# Altium PCB nexus5.PcbDoc (part 2 of 2)
Units mm, origin at the board's own origin, x right, y up, seen from the top; angles counter-clockwise.
Board outline 100 x 100 mm, 2 copper layers (Top Layer, Bottom Layer); 163 components, 162 nets, 798 pads, 136 vias.
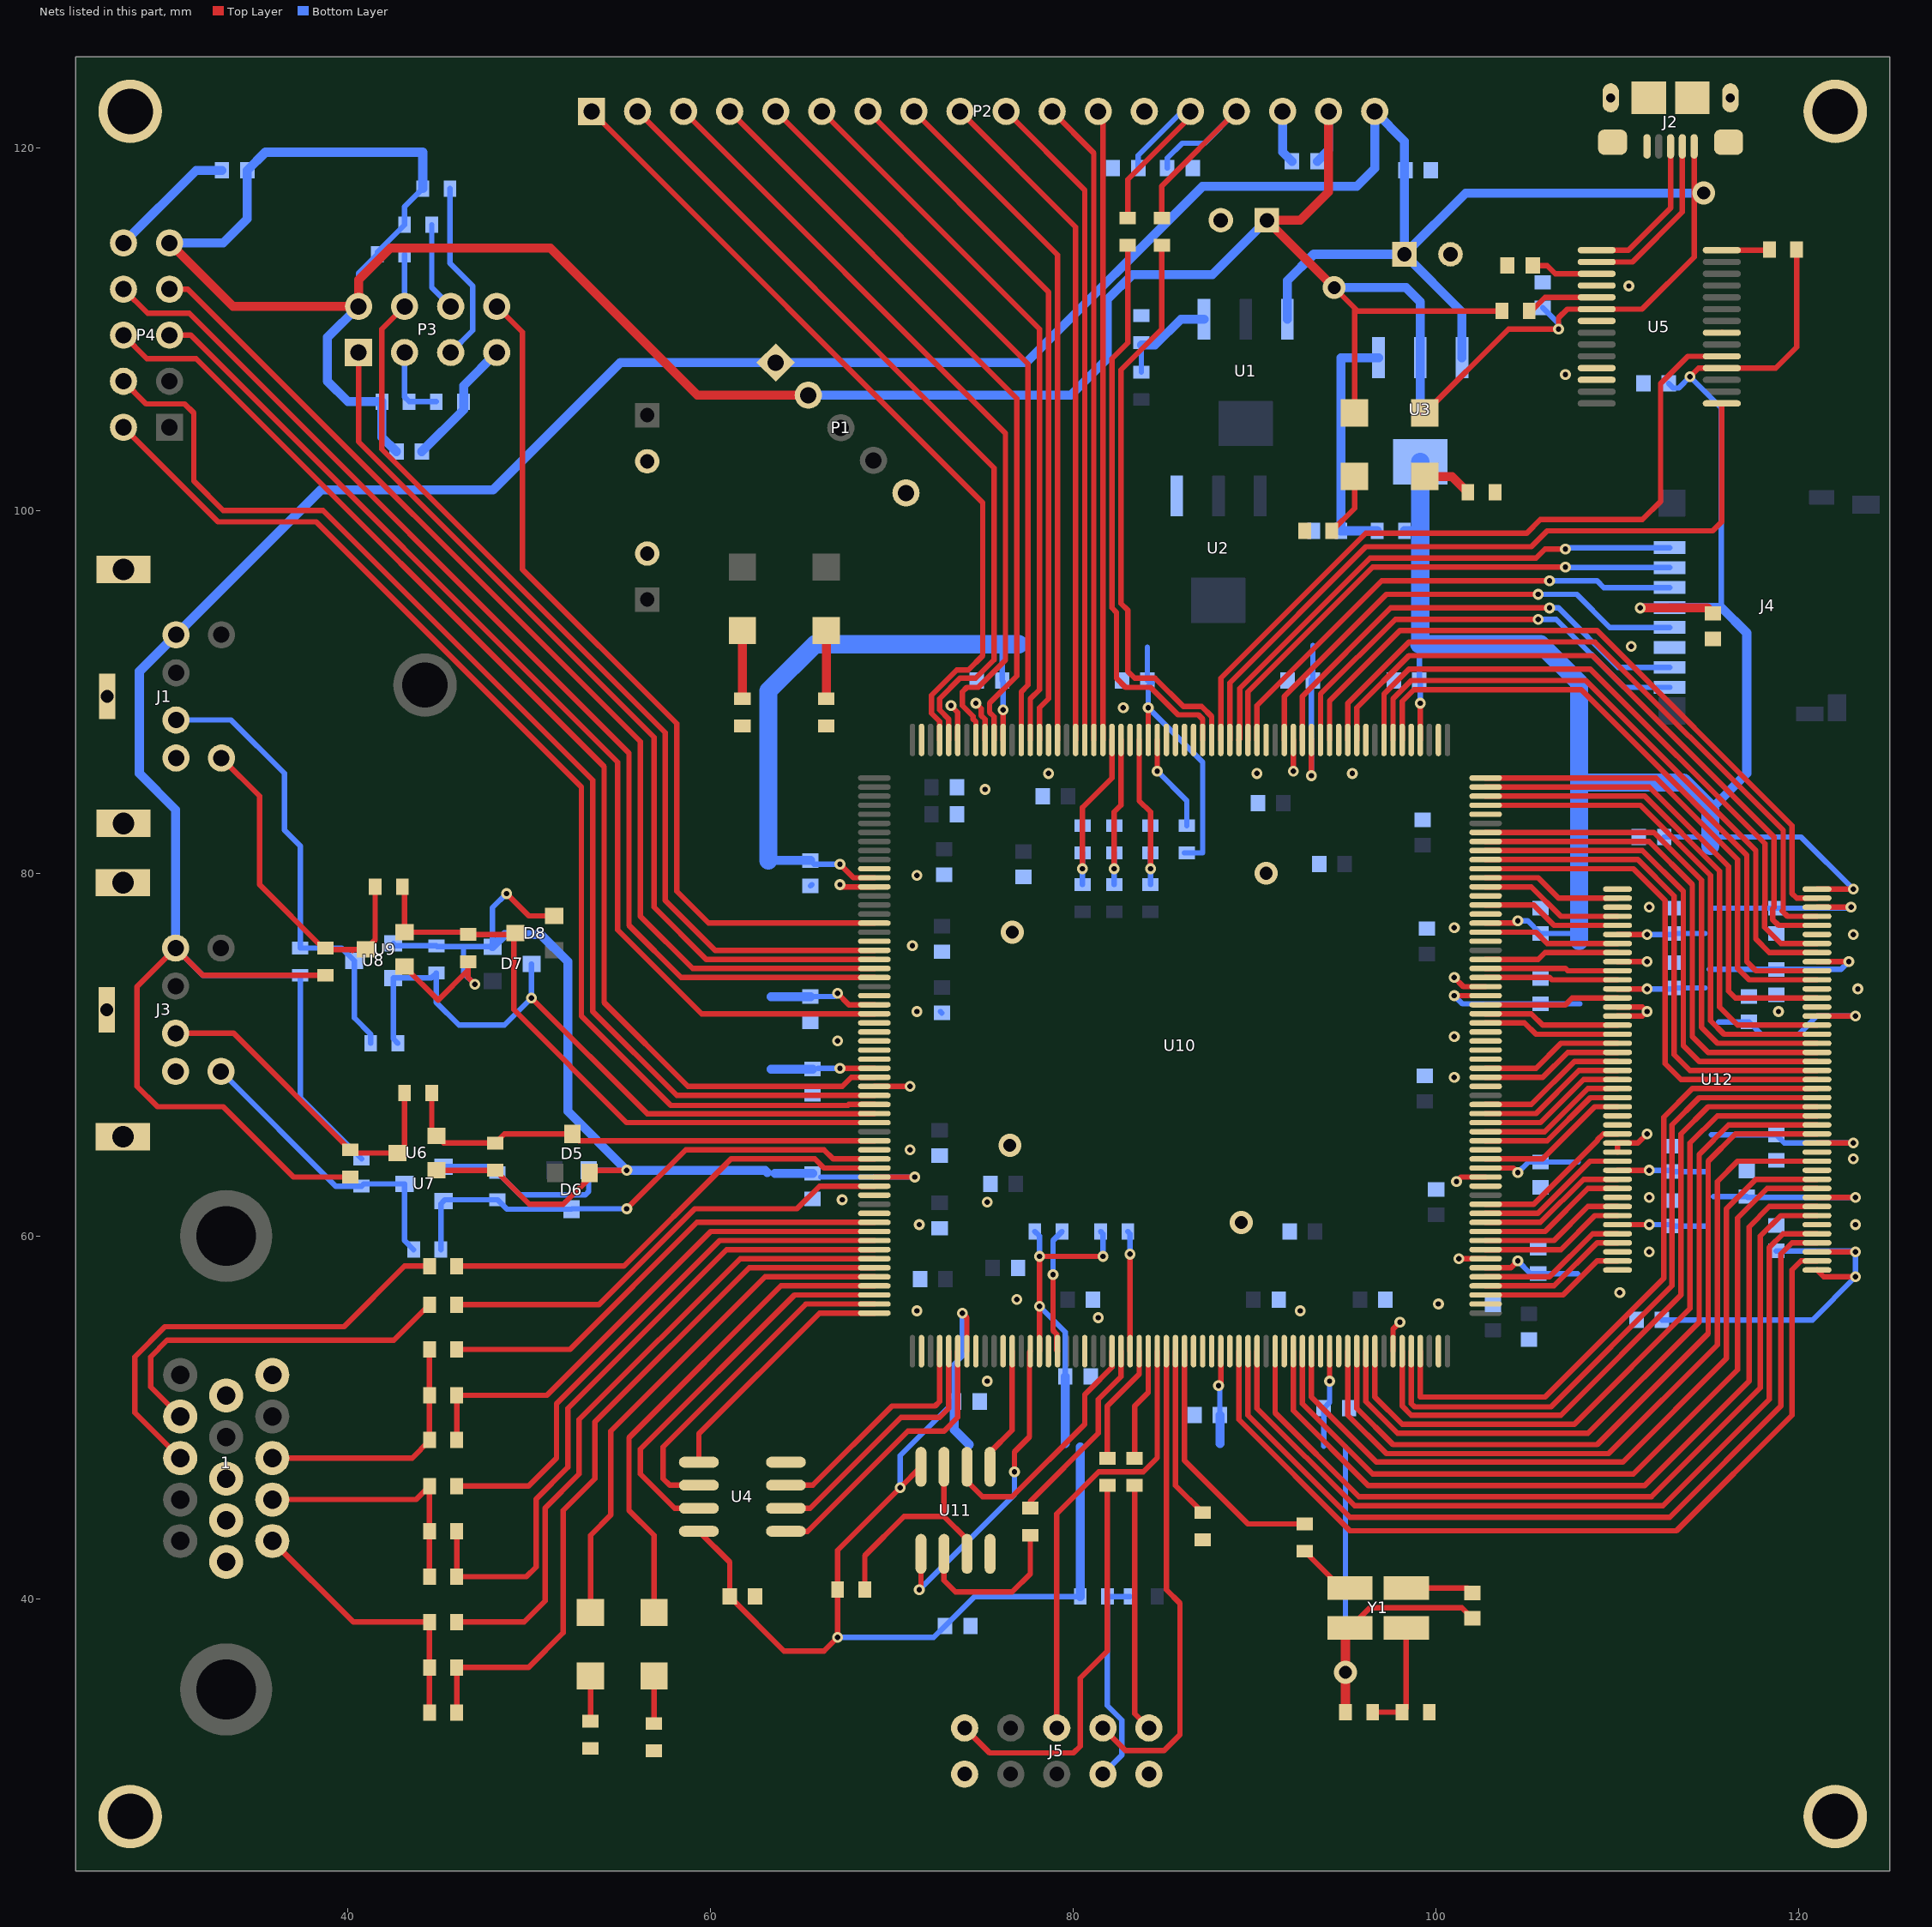
[diagram p2: the nets of this part, all layers, seen from the top]

## Via types
v1: diameter 0.6, hole 0.3, Top Layer to Bottom Layer, tented both sides, 125 vias
v2: diameter 1.27, hole 0.711, Top Layer to Bottom Layer, tented both sides, 11 vias

## Nets (pads, with @x,y where several pads share a name; then routed paths per layer and width w, separated by ;. In a path a pad name is that pad's centre, name@x,y a point inside that pad or via, vN(x,y) a via of type N, cw(c..) or ccw(c..) an arc to the next point about the centre after c; other vN are vias at no path point) (continued)
3V: C2.1 C6.2 C8.1 C9.2 C13.2 C14.2 C15.2 C16.2 C17.2 C18.2 C19.2 C20.2 C21.2 C22.2 C23.2 C24.2 C25.2 C43.2 C44.2 C45.2 C46.2 C47.2 C48.2 C49.2 C50.2 C51.2 C52.2 C53.2 C54.2 C55.2 C56.2 C61.2 C62.2 C63.2 C64.2 C65.2 C66.2 D2.1 D5.2 D6.2 D7.2 D8.2 J4.4 P1.2 P2.17 P3.2 P4.9 R5.2 R13.2 R14.1 R15.2 R17.2 R19.2 R22.2 R25.2 R26.2 R27.2 R28.2 R31.2 R41.2 R56.1 R57.1 R58.1 R60.1 U3.2 U4.8 U5.4 U6.1 U7.1 U8.1 U9.1 U10.7 U10.15 U10.35 U10.47 U10.66 U10.77 U10.96 U10.104 U10.124 U10.136 U10.154 U10.170 U10.192 U10.206 U10.213 U10.225 U11.8 U12.1 U12.3 U12.9 U12.15 U12.29 U12.35 U12.41 U12.43 U12.49 U12.55 U12.75 U12.81 Y1.4 | length 651.8
  Top Layer w0.3: U9.1@43.125,74.85 44.975,73 46.625,74.65 ; U6.1@44.875,63.625 R15.2@48.125,63.625 50,61.75 51.875,61.75 53.75,63.625 v1(55.375,63.625) ; R22.2@46.625,75.125 46.625,74.65 ; v1(47,73.875) 46.625,74.25 46.625,74.65 ; v1(48.75,78.875) 49.975,77.65 D8.2@51.375,77.65 ; U4.8@59.35,43.72 61.05,42.02 C6.2@61.05,40.125 64.05,37.125 66.25,37.125 v1(67,37.875) R31.2@67,40.5 67,42.68 v1(70.445,46.125) U11.8@71.595,47.275 ; v1(67,73.375) 67.625,72.75 U10.206@69.025,72.75 ; v1(67.125,69.25) U10.213@69.025,69.25 ; v1(67.125,80.5) 67.875,79.75 U10.192@69.025,79.75 ; U10.225@69.025,63.25 v1(71.25,63.25) ; v1(73.875,55.75) 74.125,55.5 U10.7@74.125,53.65 ; U10.170@76.125,87.35 v1(76.125,89) ; U10.15@78.125,53.65 v1(78.125,58.875) v1(81.625,58.875) ; U10.154@84.125,87.35 v1(84.125,89.125) ; v1(88,51.75) 88.125,51.875 U10.35@88.125,53.65 ; v1(93.125,85.375) U10.136@93.125,87.35 ; v1(94.125,52) U10.47@94.125,53.65 ; v2(94.375,112.29) 95.5,111.165 ; Y1.4@95.25,38.4 96.35,39.5 101.425,39.5 C17.2@102,38.925 ; D2.1@95.5,105.375 95.5,111.165 ; U10.124@99.125,87.35 v1(99.125,89.375) ; v1(101,73.25) U10.96@102.725,73.25 ; U10.66@102.725,58.25 104.125,58.25 v1(104.5,58.625) ; U10.77@102.725,63.75 104.25,63.75 v1(104.5,63.5) ; U10.104@102.725,77.25 104.375,77.25 v1(104.5,77.375) ; R14.1@103.625,111 95.665,111 95.5,111.165 ; U12.81@110,60.625 v1(111.75,60.625) ; U12.75@110,63.625 v1(111.75,63.625) ; U12.55@110,73.625 v1(111.625,73.625) ; U12.49@110,76.625 v1(111.625,76.625) ; v1(114,107.375) 114.475,107.85 U5.4@115.75,107.85 118.725,107.85 119.875,109 R13.2@119.875,114.375 ; U12.1@121,58.125 121.375,57.75 v1(123.125,57.75) ; U12.3@121,59.125 v1(123.125,59.125) ; U12.9@121,62.125 v1(123.125,62.125) ; U12.15@121,65.125 v1(123,65.125) ; U12.29@121,72.125 v1(123.125,72.125) ; U12.35@121,75.125 v1(122.75,75.125) ; U12.41@121,78.125 v1(122.875,78.125) ; U12.43@121,79.125 v1(123,79.125)
  Top Layer w0.5: P4.9@30.165,114.745 33.66,111.25 P3.2@40.585,111.25 40.585,112.71 42.335,114.46 51.165,114.46 59.272,106.353 P1.2@65.381,106.353 ; P2.17@94.07,122 94.07,117.57 92.5,116 C2.1@90.665,116 v2(94.375,112.29) ; R60.1@95,33.75 v2(95,35.95) 95,38.15 Y1.4@95.25,38.4 ; v1(111.25,94.625) 114.95,94.625 C15.2@115.25,94.325
  Bottom Layer w0.3: P3.2@40.585,111.25 40.585,113.085 R26.2@41.625,114.125 41.625,114.25 R25.2@43.125,115.75 43.125,116.75 R27.2@44.125,117.75 ; U8.1@42.5,76.125 42.625,76 R19.2@44.875,76 44.925,75.95 46.375,75.95 ; U7.1@45.275,63.825 47.925,63.825 R17.2@48.25,63.5 49.473,62.277 53.089,62.277 53.275,62.463 D6.2@53.275,63.625 v1(55.375,63.625) ; v1(47,73.875) 46.375,74.5 46.375,75.95 ; v1(48.75,78.875) 47.975,78.1 D7.2@47.975,75.95 46.375,75.95 ; C20.2@65.5,73.2 66.825,73.2 v1(67,73.375) ; C18.2@65.5,80.7 65.7,80.5 v1(67.125,80.5) ; C21.2@65.925,69.25 v1(67.125,69.25) ; C22.2@66.075,63.25 v1(71.25,63.25) ; v1(67,37.875) 72.3,37.875 C14.2@72.925,38.5 74.55,40.125 R41.2@80.375,40.125 ; v1(70.445,46.125) 70.445,47.895 C23.2@73.425,50.875 73.425,52.925 73.875,53.375 v1(73.875,55.75) ; 76.075,92.45 C50.2@76.075,90.625 76.125,90.575 v1(76.125,89) ; R57.1@77.875,60.25 78.125,60 v1(78.125,58.875) ; v1(78.125,56.125) 79.55,54.7 C24.2@79.55,52.25 ; R56.1@81.5,60.25 81.625,60.125 v1(81.625,58.875) ; C48.2@84.075,90.625 84.075,92.45 ; C48.2@84.325,90.5 84.125,90.3 v1(84.125,89.125) 87.125,86.125 87.125,81.125 R58.1@86.25,81.125 R58.1@86.125,81.125 ; v1(88,51.75) 88.075,51.675 C25.2@88.075,50.125 ; v1(93.125,85.375) C49.2@93.125,90.673 ; C49.2@93.2,90.625 93.2,92.55 ; 93.8,48.425 C43.2@93.8,50.5 94.125,50.825 v1(94.125,52) ; v2(95,35.95) 95,48.375 ; 99.075,92.625 C47.2@99.075,90.625 99.125,90.575 v1(99.125,89.375) ; v1(101,73.25) 101.45,72.8 C45.2@105.75,72.8 107.925,72.8 ; v1(104.5,58.625) 105.2,57.925 C19.2@105.625,57.925 107.8,57.925 ; v1(104.5,63.5) 105.075,64.075 C44.2@105.75,64.075 107.825,64.075 ; v1(104.5,77.375) 105.05,77.375 C46.2@105.75,76.675 107.825,76.675 ; v1(111.625,73.625) 113.075,73.625 C54.2@113.125,73.675 114.825,73.675 ; v1(111.625,76.625) 113.075,76.625 C64.2@113.125,76.675 114.825,76.675 ; v1(111.75,60.625) 113.05,60.625 C66.2@113.125,60.55 114.925,60.55 ; v1(111.75,63.625) 113.05,63.625 C65.2@113.125,63.55 114.95,63.55 ; C56.2@112.45,55.375 120.75,55.375 v1(123.125,57.75) v1(123.125,59.125) 123.075,59.175 C53.2@118.75,59.175 ; C55.2@112.575,82 115.125,82 120.125,82 v1(123,79.125) ; C8.1@112.825,107 113.075,106.75 113.375,106.75 v1(114,107.375) 115.725,105.65 115.725,94.65 ; 115.05,74.7 C62.2@118.75,74.7 122.325,74.7 v1(122.75,75.125) ; 115.175,65.575 C52.2@118.75,65.575 119.2,65.125 v1(123,65.125) ; 115.3,62.175 C63.2@117.125,62.175 117.175,62.125 v1(123.125,62.125) ; 115.325,78.075 C61.2@118.75,78.075 122.825,78.075 v1(122.875,78.125) ; 115.575,71.8 C51.2@117.25,71.8 117.925,71.125 120,71.125 121,72.125 v1(123.125,72.125)
  Bottom Layer w0.5: P4.9@30.165,114.745 33.12,114.745 34.45,116.075 C16.2@34.45,118.75 35.45,119.75 44.125,119.75 R27.2@44.125,117.75 ; P3.2@40.585,111.25 38.875,109.54 38.875,107.125 40,106 R28.2@41.875,106 41.875,104.05 C9.2@42.675,103.25 ; D7.2@47.975,75.95 48.65,76.625 50.625,76.625 52.125,75.125 52.125,66.875 v1(55.375,63.625) 63,63.625 63.125,63.5 ; 63.175,80.7 C18.2@65.5,80.7 ; 63.325,69.2 C21.2@65.625,69.2 ; 63.325,73.2 C20.2@65.5,73.2 ; 63.55,63.45 C22.2@65.625,63.45 ; P1.2@65.381,106.353 79.853,106.353 81.875,108.375 81.875,111.625 83.25,113 87.665,113 C2.1@90.665,116 ; C23.2@73.425,50.875 73.425,49.325 74.25,48.5 ; 79.55,48.55 C24.2@79.55,52.25 ; R41.2@80.375,40.125 80.375,48.375 ; 88.075,48.55 C25.2@88.075,50.125 ; C13.2@93.45,119.25 94.07,119.87 P2.17@94.07,122 ; v2(94.375,112.29) 98.335,112.29 99.125,111.5 U3.2@99.125,108.425 99.125,105.25 ; R5.2@98.25,98.875 99.125,98.875 ; v1(111.25,94.625) 112.85,94.625 J4.4@112.875,94.65 115.725,94.65 117.125,93.25 117.125,85.5 115.125,83.5
  Bottom Layer w1: 63.175,80.7 63.175,90.05 65.75,92.625 77,92.625 ; U3.2@99.125,102.675 99.125,98.875 99.125,92.675 99.075,92.625 105.75,92.625 107.875,90.5 107.875,85 ; 107.875,76.25 107.875,85 ; 115.125,81.5 115.125,82 115.125,83.5 113.625,85 107.875,85
5V: C1.1 C7.1 C12.2 D1.1 J1.4 J2.1 J3.4 P1.1 P2.18 R16.2 R18.2 R20.2 R23.2 U1.3 U3.3 U5.20 | length 218.1
  Top Layer w0.3: R23.2@38.75,74.375 32,74.375 J3.4@30.5,75.875 28.375,73.75 28.375,68.25 29.5,67.125 33.125,67.125 37,63.25 R16.2@40.125,63.25 ; D1.1@99.375,105.375 104,110 v1(106.75,110) 106.75,110.625 107.225,111.1 U5.20@108.85,111.1 111.35,111.1 114.225,113.975 J2.1@114.225,120.075
  Bottom Layer w0.3: J3.4@30.5,75.875 32,74.375 R20.2@37.375,74.375 37.375,67.625 R18.2@40.75,64.25 ; C7.1@105.875,111.175 106.75,110.3 v1(106.75,110)
  Bottom Layer w0.5: J3.4@30.5,75.875 30.5,83.5 28.5,85.5 28.5,91.125 38.5,101.125 48,101.125 55.024,108.149 P1.1@63.585,108.149 77.399,108.149 87.125,117.875 95.625,117.875 96.61,118.86 P2.18@96.61,122 98.25,120.36 C1.1@98.25,114.125 ; U1.3@91.8,110.55 91.8,112.675 93.25,114.125 C1.1@98.25,114.125 ; U3.3@101.425,108.425 101.425,110.95 C1.1@98.25,114.125 ; v2(114.75,117.5) 101.625,117.5 C1.1@98.25,114.125
ASDO: U10.12 U11.5 | length 6.9
  Top Layer w0.3: U11.5@75.405,47.275 75.405,48.075 76.625,49.295 U10.12@76.625,53.65
AUDIO_LEFT: C11.2 P2.14 R33.2 | length 11.9
  Top Layer w0.3: R33.2@83,116.125 83,118.25 86.45,121.7 P2.14@86.45,122
  Bottom Layer w0.3: C11.2@83.575,118.875 83.575,119.575 86,122 P2.14@86.45,122
AUDIO_RIGHT: C10.2 P2.15 R29.2 | length 13
  Top Layer w0.3: R29.2@84.875,116.125 84.875,117.885 P2.15@88.99,122
  Bottom Layer w0.3: C10.2@85.175,118.875 85.175,119.425 86,120.25 87.24,120.25 P2.15@88.99,122
CLK_50M: R59.2 Y1.3 | length 3.3
  Top Layer w0.3: R59.2@92.75,42.625 94.775,40.6 Y1.3@95.25,40.6
CLK_TRI: R60.2 R61.1 Y1.1 | length 6.4
  Top Layer w0.3: R60.2@96.5,33.75 R61.1@98.125,33.75 98.35,33.975 Y1.1@98.35,38.4
CONF_DONE: R58.2 U10.153 | length 5.4
  Top Layer w0.3: v1(84.625,85.625) U10.153@84.625,87.35
  Bottom Layer w0.3: v1(84.625,85.625) 86.25,84 R58.2@86.25,82.625
DATA0: R32.2 U10.24 | length 10.7
  Top Layer w0.3: R32.2@77.625,45 77.625,45.375 81.375,49.125 81.375,51 82.625,52.25 U10.24@82.625,53.65
DCLK: U10.23 U11.6 | length 13.9
  Top Layer w0.3: U11.6@74.135,47.275 74.135,46.475 74.985,45.625 76.625,45.625 80.625,49.625 80.625,51.261 80.844,51.48 82.125,52.761 U10.23@82.125,53.65
DIG_B0: R52.1 R53.1 U10.231 | length 29.2
  Top Layer w0.3: R53.1@46,48.75 R52.1@46,51.217 50.967,51.217 60,60.25 U10.231@69.025,60.25
DIG_B1: R54.1 U10.230 | length 25.9
  Top Layer w0.3: R54.1@46,53.75 52.25,53.75 59.25,60.75 U10.230@69.025,60.75
DIG_G0: R43.1 R44.1 U10.233 | length 37.1
  Top Layer w0.3: R44.1@46,43.717 R43.1@46,41.217 49.842,41.217 50.375,41.75 50.375,45.5 52.125,47.25 52.125,50.5 60.875,59.25 U10.233@69.025,59.25
DIG_G1: R48.1 U10.232 | length 30.4
  Top Layer w0.3: R48.1@46,46.217 49.967,46.217 51.5,47.75 51.5,50.75 60.5,59.75 U10.232@69.025,59.75
DIG_HSYNC: R37.2 U10.224 | length 25.7
  Top Layer w0.3: R37.2@46,58.342 55.217,58.342 60.625,63.75 61.125,64.25 65.75,64.25 66.25,63.75 U10.224@69.025,63.75
DIG_R0: R38.1 R40.1 U10.235 | length 40.4
  Top Layer w0.3: R38.1@46,33.717 R40.1@46,36.217 49.967,36.217 51.875,38.125 51.875,44.875 53.625,46.625 53.625,49.75 62.125,58.25 U10.235@69.025,58.25
DIG_R1: R42.1 U10.234 | length 36.1
  Top Layer w0.3: R42.1@46,38.717 49.717,38.717 50.875,39.875 50.875,45 52.75,46.875 52.75,49.875 61.625,58.75 U10.234@69.025,58.75
DIG_VSYNC: R34.2 U10.226 | length 25.7
  Top Layer w0.3: R34.2@46,56.217 53.842,56.217 59.125,61.5 64.75,61.5 66,62.75 U10.226@69.025,62.75
ETH_CS: P4.7 U10.202 | length 60
  Top Layer w0.3: P4.7@30.165,112.205 31.17,112.205 56.125,87.25 56.125,77.625 59,74.75 U10.202@69.025,74.75
ETH_INT: P4.2 U10.217 | length 64.3
  Top Layer w0.3: P4.2@27.625,104.585 32.835,99.375 38.25,99.375 52.875,84.75 52.875,72.125 57.804,67.196 67.562,67.196 67.616,67.25 U10.217@69.025,67.25
ETH_RESET: P4.8 U10.203 | length 62.7
  Top Layer w0.3: P4.8@27.625,112.205 28.955,110.875 31.25,110.875 55.5,86.625 55.5,77.125 58.375,74.25 U10.203@69.025,74.25
ETH_SCK: P4.6 U10.214 | length 66.4
  Top Layer w0.3: P4.6@27.625,109.665 28.915,108.375 31.625,108.375 54.125,85.875 54.125,72.875 58.75,68.25 67.25,68.25 67.75,68.75 U10.214@69.025,68.75
ETH_SI: P4.5 U10.207 | length 59.8
  Top Layer w0.3: P4.5@30.165,109.665 31.335,109.665 54.875,86.125 54.875,76.875 59.5,72.25 U10.207@69.025,72.25
ETH_SO: P4.4 U10.216 | length 67.4
  Top Layer w0.3: P4.4@27.625,107.125 28.875,105.875 31,105.875 31.5,105.375 31.5,101.625 33.125,100 38.625,100 53.5,85.125 53.5,72.375 58.125,67.75 U10.216@69.025,67.75
FLASH_DQ1: R32.1 U11.2 | length 9
  Top Layer w0.3: U11.2@72.865,42.475 72.865,41.01 73.5,40.375 76.625,40.375 77.625,41.375 R32.1@77.625,43.5
FPGA_FT232_RX: U5.1 U10.145 | length 40.5
  Top Layer w0.3: U10.145@88.625,87.35 88.625,90.5 96.125,98 105.25,98 106.125,98.875 115.25,98.875 115.75,99.375 U5.1@115.75,105.9
FPGA_FT232_TX: U5.5 U10.146 | length 42.2
  Top Layer w0.3: U10.146@88.125,87.35 88.125,90.75 96.125,98.75 105,98.75 105.75,99.5 111.375,99.5 112.375,100.5 112.375,107 113.875,108.5 U5.5@115.75,108.5
FPGA_KBD_CLOCK: D6.3 R10.2 R17.1 U7.2 U10.223 | length 28.3
  Top Layer w0.3: v1(55.375,61.5) 58.625,64.75 66.25,64.75 66.75,64.25 U10.223@69.025,64.25
  Bottom Layer w0.3: R10.2@45.125,59.25 45.125,61.775 U7.2@45.275,61.925 45.35,62 R17.1@48.25,62 48.775,61.475 D6.3@52.325,61.475 52.35,61.5 v1(55.375,61.5)
FPGA_KBD_DATA: D5.3 R9.2 R15.1 U6.2 U10.221 | length 27.1
  Top Layer w0.3: R9.2@44.625,67.875 44.625,65.775 U6.2@44.875,65.525 45.275,65.125 R15.1@48.125,65.125 48.625,65.625 D5.3@52.375,65.625 52.75,65.25 U10.221@69.025,65.25
FPGA_MOUSE_CLOCK: D8.3 R12.2 R22.1 U9.2 U10.219 | length 34.9
  Top Layer w0.3: R12.2@43,79.25 43.125,79.125 U9.2@43.125,76.75 R22.1@46.375,76.75 ; R22.1@46.625,76.625 49.15,76.625 49.15,72.475 55.375,66.25 U10.219@69.025,66.25
FPGA_MOUSE_DATA: D7.3 R11.2 R19.1 U8.2 U10.218 | length 37.6
  Top Layer w0.3: v1(50.125,73.125) 56.5,66.75 56.506,66.744 69.019,66.744 U10.218@69.025,66.75
  Bottom Layer w0.3: R11.2@42.75,70.625 42.5,70.875 U8.2@42.5,74.225 44.6,74.225 R19.1@44.875,74.5 44.875,72.875 46.125,71.625 48.625,71.625 v1(50.125,73.125) D7.3@50.125,75
FPGA_TCK: R36.2 U10.27 | length 6.2
  Top Layer w0.3: R36.2@83.375,47.75 83.375,50.625 84.125,51.375 U10.27@84.125,53.65
FPGA_TDI: R35.2 U10.26 | length 6.6
  Top Layer w0.3: R35.2@81.875,47.75 81.875,50.625 83.625,52.375 U10.26@83.625,53.65
GND: 1.5 1.6 1.7 1.8 1.10 C1.2 C2.2 C3.2 C4.2 C5.2 C6.1 C7.2 C8.2 C9.1 C10.1 C11.1 C12.1 C13.1 C14.1 C15.1 C16.1 C17.1 C18.1 C19.1 C20.1 C21.1 C22.1 C23.1 C24.1 C25.1 C26.1 C27.1 C28.1 C29.1 C30.1 C31.1 C32.1 C33.1 C34.1 C35.1 C36.1 C37.1 C38.1 C39.1 C40.1 C41.1 C42.1 C43.1 C44.1 C45.1 C46.1 C47.1 C48.1 C49.1 C50.1 C51.1 C52.1 C53.1 C54.1 C55.1 C56.1 C57.1 C58.1 C59.1 C60.1 C61.1 C62.1 C63.1 C64.1 C65.1 C66.1 C67.1 C68.1 C69.1 J1.0 J1.3 J2.5 J2.S J3.0 J3.3 J4.6 J5.2 J5.10 P1.5 P2.13 P2.16 P3.7 P4.10 pad.3@28,28 pad.3@28,122 pad.3@122,28 pad.3@122,122 R1.1 R2.1 R3.1 R6.1 R7.1 R8.1 R21.1 R24.1 R30.1 R49.1 R50.1 R51.1 R55.2 R61.2 U2.1 U4.4 U5.7 U5.18 U5.21 U5.25 U5.26 U10.2 U10.8 U10.11 U10.16 U10.20 U10.32 U10.33 U10.34 U10.36 U10.42 U10.46 U10.48 U10.54 U10.59 U10.62 U10.67 U10.75 U10.76 U10.79 U10.86 U10.89 U10.90 U10.91 U10.92 U10.97 U10.102 U10.105 U10.107 U10.116 U10.122 U10.125 U10.130 U10.133 U10.138 U10.141 U10.149 U10.150 U10.151 U10.152 U10.156 U10.165 U10.172 U10.175 U10.179 U10.191 U10.193 U10.199 U10.205 U10.208 U10.209 U10.210 U10.211 U10.212 U10.215 U10.222 U10.227 U10.229 U11.4 U12.6 U12.12 U12.14 U12.30 U12.32 U12.38 U12.44 U12.46 U12.52 U12.57 U12.58 U12.69 U12.70 U12.72 U12.73 U12.78 U12.84 U12.86 Y1.2 | length 45.5
  Top Layer w0.3: v1(67.125,79.375) 67.25,79.25 U10.193@69.025,79.25 ; U10.215@69.025,68.25 v1(71,68.25) ; v1(73.25,89.25) 73.25,89.236 73.625,88.861 U10.175@73.625,87.35 ; v1(74.625,89.375) 74.923,89.077 74.923,88.688 75.125,88.486 U10.172@75.125,87.35 ; v1(92.125,85.625) U10.138@92.125,87.35 ; U10.54@97.625,53.65 97.625,54.875 v1(98,55.25) ; Y1.2@98.35,40.6 101.725,40.6 C17.1@102,40.325 ; v1(101,74.25) 101.5,73.75 U10.97@102.725,73.75 ; v1(101.125,63) 101.375,63.25 U10.76@102.725,63.25 ; v1(101.25,58.75) U10.67@102.725,58.75 ; U12.73@110,64.625 U12.72@110,65.125 111.125,65.125 v1(111.625,65.625) ; U12.58@110,72.125 111.375,72.125 v1(111.625,72.375) 111.375,72.625 U12.57@110,72.625 ; U12.52@110,75.125 v1(111.625,75.125) ; U5.7@115.75,109.8 U5.7@115.775,109.825
  Bottom Layer w0.3: C18.1@65.5,79.3 C18.1@65.575,79.375 ; C29.1@72.675,72.375 C29.1@72.75,72.3
  Bottom Layer w0.5: P4.10@27.625,114.745 31.63,118.75 C16.1@33.05,118.75 ; C9.1@44.075,103.25 46.375,105.55 R30.1@46.375,106 46.375,106.88 P3.7@48.205,108.71 ; P2.16@91.53,122 91.53,119.77 C13.1@92.05,119.25
  other v1: 75.25,52 81.375,55.5 71.375,55.875 92.5,55.875 100.125,56.25 76.875,56.5 110.125,56.875 111.75,59.125 71.5,60.625 123.125,60.625 75.25,61.875 67.25,62 111.75,62.125 123,64.25 71,64.75 101,68.75 67,70.75 101,71 71.375,72.375 118.875,72.375 123.25,73.625 71.125,76 123,76.625 101,77 111.75,78.125 71.375,79.875 75.125,84.625 78.625,85.5 90.125,85.5 95.375,85.5 82.75,89.125 110.75,92.5 107.125,107.5 110.625,112.375
  other v2: 89.25,60.75 76.5,65 76.625,76.75 90.625,80
GPIO0_0: P2.12 U10.159 | length 34.8
  Top Layer w0.3: P2.12@81.37,122 81.625,121.745 U10.159@81.625,87.35
GPIO0_1: P2.11 U10.160 | length 35.6
  Top Layer w0.3: P2.11@78.83,122 81.125,119.705 U10.160@81.125,87.35
GPIO0_2: P2.10 U10.161 | length 36.4
  Top Layer w0.3: P2.10@76.29,122 80.625,117.665 U10.161@80.625,87.35
GPIO0_3: P2.9 U10.162 | length 37.3
  Top Layer w0.3: P2.9@73.75,122 80.125,115.625 U10.162@80.125,87.35
GPIO0_4: P2.8 U10.164 | length 37.9
  Top Layer w0.3: P2.8@71.21,122 79.125,114.085 U10.164@79.125,87.35
GPIO0_5: P2.7 U10.166 | length 39
  Top Layer w0.3: P2.7@68.67,122 78.625,112.045 78.625,89.625 78.125,89.125 U10.166@78.125,87.35
GPIO0_6: P2.6 U10.167 | length 39.8
  Top Layer w0.3: P2.6@66.13,122 78.125,110.005 78.125,90.125 77.625,89.625 U10.167@77.625,87.35
GPIO0_7: P2.5 U10.168 | length 40.6
  Top Layer w0.3: P2.5@63.59,122 77.5,108.09 77.5,90.375 77.125,90 U10.168@77.125,87.35
GPIO0_8: P2.4 U10.171 | length 41.9
  Top Layer w0.3: P2.4@61.05,122 76.875,106.175 76.875,90.875 75.375,89.375 75.375,88.875 75.625,88.625 U10.171@75.625,87.35
GPIO0_9: P2.3 U10.173 | length 43.7
  Top Layer w0.3: P2.3@58.51,122 76.25,104.26 76.25,91.75 74.75,90.25 74.125,90.25 73.875,90 73.875,89.25 74.471,88.654 74.471,88.501 74.625,88.347 U10.173@74.625,87.35
GPIO0_10: P2.2 U10.176 | length 44.7
  Top Layer w0.3: P2.2@55.97,122 75.625,102.345 75.625,91.764 74.611,90.75 73.75,90.75 72.625,89.625 72.625,89 73.125,88.5 U10.176@73.125,87.35
GPIO0_11: P2.1 U10.177 | length 45.3
  Top Layer w0.3: P2.1@53.43,122 75,100.43 75,92 74.202,91.202 73.563,91.202 72.173,89.812 72.173,88.813 72.625,88.361 U10.177@72.625,87.35
JTAG_TCK: J5.1 R36.1 | length 13.7
  Top Layer w0.3: R36.1@83.375,46.25 83.375,33.665 J5.1@84.165,32.875
JTAG_TDI: J5.9 R35.1 | length 22.1
  Top Layer w0.3: J5.9@74.005,32.875 75.38,31.5 80,31.5 80.375,31.875 80.375,35.625 81.875,37.125 R35.1@81.875,46.25
JTAG_TDO: J5.3 U10.29 | length 26.6
  Top Layer w0.3: J5.3@81.625,32.875 82.875,31.625 85,31.625 85.875,32.5 85.875,39.75 85.125,40.5 U10.29@85.125,53.65
JTAG_TMS: J5.5 U10.28 | length 24.5
  Top Layer w0.3: J5.5@79.085,32.875 79.085,44.687 81.398,47 83.852,47 84.625,47.773 U10.28@84.625,53.65
KBD_CLOCK: J3.5 R10.1 R18.1 U7.3 | length 16.6
  Bottom Layer w0.3: J3.5@33,69.075 39.325,62.75 R18.1@40.75,62.75 40.875,62.875 U7.3@43.125,62.875 43.125,59.75 R10.1@43.625,59.25
KBD_DATA: J3.1 R9.1 R16.1 U6.3 | length 18.4
  Top Layer w0.3: J3.1@30.5,71.175 33.7,71.175 R16.1@40.125,64.75 40.3,64.575 U6.3@42.725,64.575 43.125,64.975 R9.1@43.125,67.875
LED0: D9.1 U10.237 | length 27.2
  Top Layer w0.3: D9.1@56.875,39.25 56.875,43.5 55.5,44.875 55.5,48.875 63.875,57.25 U10.237@69.025,57.25
LED1: D10.1 U10.236 | length 28.5
  Top Layer w0.3: D10.1@53.374,39.25 53.374,43.499 54.5,44.625 54.5,49.25 63,57.75 U10.236@69.025,57.75
MICROSD_CLK: J4.5 U10.139 | length 26.7
  Top Layer w0.3: U10.139@91.625,87.35 91.625,89.75 97.25,95.375 v1(105.625,95.375)
  Bottom Layer w0.3: v1(105.625,95.375) 107.75,95.375 109.575,93.55 J4.5@112.875,93.55
MICROSD_CMD: J4.3 U10.142 | length 27.7
  Top Layer w0.3: U10.142@90.125,87.35 90.125,89.25 97,96.125 v1(106.25,96.125)
  Bottom Layer w0.3: v1(106.25,96.125) 108.875,96.125 109.25,95.75 J4.3@112.875,95.75
MICROSD_DAT0: J4.7 U10.137 | length 26
  Top Layer w0.3: U10.137@92.625,87.35 92.625,89.75 97.5,94.625 v1(106.25,94.625)
  Bottom Layer w0.3: v1(106.25,94.625) 106.75,94.625 110.025,91.35 J4.7@112.875,91.35
MICROSD_DAT1: J4.8 U10.135 | length 25
  Top Layer w0.3: U10.135@93.625,87.35 93.625,89.875 97.75,94 v1(105.625,94)
  Bottom Layer w0.3: v1(105.625,94) 106.625,94 110.375,90.25 J4.8@112.875,90.25
MICROSD_DAT2: J4.1 U10.144 | length 29.8
  Top Layer w0.3: U10.144@89.125,87.35 89.173,87.398 89.173,90.187 96.361,97.375 105.5,97.375 106,97.875 v1(107.125,97.875)
  Bottom Layer w0.3: v1(107.125,97.875) 107.2,97.95 J4.1@112.875,97.95
MICROSD_DAT3: J4.2 U10.143 | length 28.8
  Top Layer w0.3: U10.143@89.625,87.35 89.625,90 96.5,96.875 v1(107.125,96.875)
  Bottom Layer w0.3: v1(107.125,96.875) 107.15,96.85 J4.2@112.875,96.85
MOUSE_CLOCK: J1.5 R12.1 R23.1 U9.3 | length 18.9
  Top Layer w0.3: J1.5@33.025,86.35 33.062,86.312 35.125,84.25 35.125,79.375 38.7,75.8 40.2,75.8 ; 40.25,75.75 40.2,75.8 ; R12.1@41.5,79.25 41.5,76.325 U9.3@40.975,75.8 40.2,75.8
MOUSE_DATA: J1.1 R11.1 R20.1 U8.3 | length 25.4
  Bottom Layer w0.3: J1.1@30.525,88.45 33.55,88.45 36.5,85.5 36.5,82.375 37.375,81.5 R20.1@37.375,75.875 39.65,75.875 U8.3@40.35,75.175 40.35,72.025 41.25,71.125 R11.1@41.25,70.625
MSEL0: R45.1 R49.2 U10.155 | length 9
  Top Layer w0.3: U10.155@83.625,87.35 83.625,84 84.25,83.375 v1@84.25,80.375
  Bottom Layer w0.3: R45.1@84.25,79.375 v1(84.25,80.25) R49.2@84.25,81.125
MSEL1: R46.1 R50.2 U10.157 | length 8.9
  Top Layer w0.3: v1@82.25,80.375 82.25,83.375 82.625,83.75 U10.157@82.625,87.35
  Bottom Layer w0.3: R46.1@82.25,79.375 v1(82.25,80.25) R50.2@82.25,81.125
MSEL2: R47.1 R51.2 U10.158 | length 9.4
  Top Layer w0.3: v1@80.5,80.375 80.5,83.625 82.125,85.25 U10.158@82.125,87.35
  Bottom Layer w0.3: R47.1@80.5,79.375 v1(80.5,80.25) R51.2@80.5,81.125
nCE: R55.1 U10.30 | length 9.5
  Top Layer w0.3: U10.30@85.625,53.65 85.625,46.25 R55.1@87.125,44.75
nCONFIG: R56.2 U10.25 | length 6.7
  Top Layer w0.3: U10.25@83.125,53.65 v1(83.125,59)
  Bottom Layer w0.3: R56.2@83,60.25 83.125,60.125 v1(83.125,59)
nCSO: U10.14 U11.1 | length 18.5
  Top Layer w0.3: v1(71.5,40.5) 71.595,40.595 U11.1@71.595,42.475 U11.1@71.595,43.275 ; v1(76.75,47) 76.75,48.096 77.577,48.923 77.577,53.602 U10.14@77.625,53.65
  Bottom Layer w0.3: v1(71.5,40.5) 76.75,45.75 v1(76.75,47)
NetC5_1: C5.1 U5.17 | length 3.6
  Top Layer w0.3: C5.1@105.45,113.5 106.125,113.5 106.575,113.05 U5.17@108.85,113.05
NetD1_2: D1.2 R1.2 | length 2.7
  Top Layer w0.5: D1.2@99.375,101.875 100.875,101.875 R1.2@101.75,101
NetD2_2: D2.2 R2.2 | length 3.5
  Top Layer w0.3: R2.2@94.25,98.875 95.5,100.125 D2.2@95.5,101.875
NetD3_2: D3.2 R3.2 | length 3.8
  Top Layer w0.5: R3.2@61.75,89.625 D3.2@61.75,93.375
NetD4_2: D4.2 R7.2 | length 3.8
  Top Layer w0.5: R7.2@66.375,89.625 D4.2@66.375,93.375
NetD9_2: D9.2 R21.2 | length 2.6
  Top Layer w0.3: R21.2@56.875,33.125 D9.2@56.875,35.75
NetD10_2: D10.2 R24.2 | length 2.5
  Top Layer w0.3: D10.2@53.374,35.75 53.374,33.251 R24.2@53.375,33.25
NetR4_1: R4.1 R6.2 U1.1 | length 5.5
  Bottom Layer w0.3: R4.1@83.75,107.625 R6.2@83.75,109.125
  Bottom Layer w0.5: R6.2@83.75,109.125 84.5,109.125 85.925,110.55 U1.1@87.2,110.55
NetR5_1: R5.1 R8.2 U3.1 | length 13.6
  Bottom Layer w0.5: R5.1@96.75,98.875 R8.2@94.75,98.875 94.75,108.425 U3.1@96.825,108.425
NetR13_1: R13.1 U5.14 | length 2.6
  Top Layer w0.3: U5.14@115.75,114.35 118.35,114.35 R13.1@118.375,114.375
NetR14_2: R14.2 U5.19 | length 3.9
  Top Layer w0.3: R14.2@105.25,111 106,111.75 U5.19@108.85,111.75
NetR31_1: R31.1 U11.3 U11.7 | length 12.5
  Top Layer w0.3: R31.1@68.5,40.5 68.5,42.375 70.67,44.545 72.865,44.545 ; U11.7@72.865,47.275 72.865,44.545 ; U11.3@74.135,42.475 74.135,43.275 72.865,44.545
NetR59_1: R59.1 U10.31 | length 14.1
  Top Layer w0.3: U10.31@86.125,53.65 86.125,47.625 89.625,44.125 R59.1@92.75,44.125
nSTATUS: R57.2 U10.17 | length 6.9
  Top Layer w0.3: v1(78.875,57.875) 78.875,54.789 79.077,54.587 79.077,53.698 U10.17@79.125,53.65
  Bottom Layer w0.3: v1(78.875,57.875) 78.875,59.75 R57.2@79.375,60.25
PWM_LEFT: R33.1 U10.148 | length 31.2
  Top Layer w0.3: R33.1@83,114.625 83,109.25 82.125,108.375 82.125,94.625 82.375,94.375 82.375,90.75 82.875,90.25 84.25,90.25 85.764,88.736 86.889,88.736 87.125,88.5 U10.148@87.125,87.35
PWM_RIGHT: R29.1 U10.147 | length 31.5
  Top Layer w0.3: R29.1@84.875,114.625 84.875,110 82.625,107.75 82.625,94.875 83,94.5 83,91.125 83.375,90.75 84.5,90.75 86.062,89.188 87.076,89.188 87.625,88.639 U10.147@87.625,87.35
SDRAM_A0: U10.113 U12.25 | length 28
  Top Layer w0.3: U10.113@102.725,81.75 111.75,81.75 114.125,79.375 114.125,71 115,70.125 U12.25@121,70.125
SDRAM_A1: U10.114 U12.26 | length 27.8
  Top Layer w0.3: U10.114@102.725,82.25 112,82.25 114.625,79.625 114.625,71.5 115.5,70.625 U12.26@121,70.625
SDRAM_A2: U10.117 U12.27 | length 28.2
  Top Layer w0.3: U10.117@102.725,83.75 111.25,83.75 115.125,79.875 115.125,71.875 115.875,71.125 U12.27@121,71.125
SDRAM_A3: U10.93 U12.60 | length 7.5
  Top Layer w0.3: U10.93@102.725,71.75 104.875,71.75 105.5,71.125 U12.60@110,71.125
SDRAM_A4: U10.88 U12.61 | length 7.8
  Top Layer w0.3: U10.88@102.725,69.25 105.5,69.25 106.875,70.625 U12.61@110,70.625
SDRAM_A5: U10.87 U12.62 | length 7.8
  Top Layer w0.3: U10.87@102.725,68.75 105.875,68.75 107.25,70.125 U12.62@110,70.125
SDRAM_A6: U10.84 U12.63 | length 8.3
  Top Layer w0.3: U10.84@102.725,67.25 105.25,67.25 107.625,69.625 U12.63@110,69.625
SDRAM_A7: U10.83 U12.64 | length 8.3
  Top Layer w0.3: U10.83@102.725,66.75 105.5,66.75 107.875,69.125 U12.64@110,69.125
SDRAM_A8: U10.82 U12.65 | length 8.3
  Top Layer w0.3: U10.82@102.725,66.25 105.75,66.25 108.125,68.625 U12.65@110,68.625
SDRAM_A9: U10.81 U12.66 | length 8.3
  Top Layer w0.3: U10.81@102.725,65.75 105.986,65.75 108.361,68.125 U12.66@110,68.125
SDRAM_A10: U10.112 U12.24 | length 28.1
  Top Layer w0.3: U10.112@102.725,81.25 111.375,81.25 113.625,79 113.625,70.5 114.5,69.625 U12.24@121,69.625
SDRAM_A11: U10.57 U12.21 | length 36.6
  Top Layer w0.3: U10.57@99.125,53.65 99.125,51.125 106,51.125 112.548,57.673 112.548,66.548 114.125,68.125 U12.21@121,68.125
SDRAM_BA0: U10.110 U12.22 | length 28.4
  Top Layer w0.3: U10.110@102.725,80.25 110.875,80.25 112.625,78.5 112.625,69.5 113.5,68.625 U12.22@121,68.625
SDRAM_BA1: U10.111 U12.23 | length 28.2
  Top Layer w0.3: U10.111@102.725,80.75 111.125,80.75 113.125,78.75 113.125,70 114,69.125 U12.23@121,69.125
SDRAM_CKE: U10.80 U12.67 | length 8.3
  Top Layer w0.3: U10.80@102.725,65.25 106.125,65.25 108.5,67.625 U12.67@110,67.625
SDRAM_CLK: U10.78 U12.68 | length 8.5
  Top Layer w0.3: U10.78@102.725,64.25 105.875,64.25 108.75,67.125 U12.68@110,67.125
SDRAM_DQ0: U10.37 U12.2 | length 49
  Top Layer w0.3: U10.37@89.125,53.65 89.125,49.875 95.25,43.75 113.25,43.75 119.625,50.125 119.625,58.125 120.125,58.625 U12.2@121,58.625
SDRAM_DQ1: U10.38 U12.4 | length 48.4
  Top Layer w0.3: U10.38@89.625,53.65 89.625,50.125 95.25,44.5 112.875,44.5 119,50.625 119,59 119.625,59.625 U12.4@121,59.625
SDRAM_DQ2: U10.39 U12.5 | length 47.4
  Top Layer w0.3: U10.39@90.125,53.65 90.125,50.5 95.5,45.125 112.5,45.125 118.375,51 118.375,59.375 119.125,60.125 U12.5@121,60.125
SDRAM_DQ3: U10.41 U12.7 | length 46.5
  Top Layer w0.3: U10.41@91.125,53.65 91.125,50.25 95.75,45.625 111.875,45.625 117.875,51.625 117.875,60 119,61.125 U12.7@121,61.125
SDRAM_DQ4: U10.43 U12.8 | length 45.2
  Top Layer w0.3: U10.43@92.125,53.65 92.125,50.375 96.25,46.25 111.5,46.25 117.25,52 117.25,60.5 118.375,61.625 U12.8@121,61.625
SDRAM_DQ5: U10.44 U12.10 | length 44.3
  Top Layer w0.3: U10.44@92.625,53.65 92.625,50.75 96.5,46.875 110.875,46.875 116.625,52.625 116.625,61 118.25,62.625 U12.10@121,62.625
SDRAM_DQ6: U10.45 U12.11 | length 43.2
  Top Layer w0.3: U10.45@93.125,53.65 93.125,51.125 96.702,47.548 110.298,47.548 116,53.25 116,61.5 117.625,63.125 U12.11@121,63.125
SDRAM_DQ7: U10.49 U12.13 | length 42.2
  Top Layer w0.3: U10.49@95.125,53.65 95.125,50.125 97.25,48 109.5,48 115.5,54 115.5,63 116.625,64.125 U12.13@121,64.125
SDRAM_DQ8: U10.72 U12.74 | length 8.5
  Top Layer w0.3: U10.72@102.725,61.25 105.611,61.25 108.486,64.125 U12.74@110,64.125
SDRAM_DQ9: U10.71 U12.76 | length 8.3
  Top Layer w0.3: U10.71@102.725,60.75 105.75,60.75 108.125,63.125 U12.76@110,63.125
SDRAM_DQ10: U10.70 U12.77 | length 8.3
  Top Layer w0.3: U10.70@102.725,60.25 106,60.25 108.375,62.625 U12.77@110,62.625
SDRAM_DQ11: U10.69 U12.79 | length 8.1
  Top Layer w0.3: U10.69@102.725,59.75 106.5,59.75 108.375,61.625 U12.79@110,61.625
SDRAM_DQ12: U10.68 U12.80 | length 8.1
  Top Layer w0.3: U10.68@102.725,59.25 106.875,59.25 108.75,61.125 U12.80@110,61.125
SDRAM_DQ13: U10.65 U12.82 | length 8.3
  Top Layer w0.3: U10.65@102.725,57.75 106.25,57.75 108.625,60.125 U12.82@110,60.125
SDRAM_DQ14: U10.64 U12.83 | length 8.3
  Top Layer w0.3: U10.64@102.725,57.25 106.5,57.25 108.875,59.625 U12.83@110,59.625
SDRAM_DQ15: U10.63 U12.85 | length 8.1
  Top Layer w0.3: U10.63@102.725,56.75 107,56.75 108.875,58.625 U12.85@110,58.625
SDRAM_DQ16: U10.119 U12.31 | length 27.1
  Top Layer w0.3: U10.119@102.725,84.75 111.75,84.75 116.125,80.375 116.125,73.5 116.5,73.125 U12.31@121,73.125
SDRAM_DQ17: U10.120 U12.33 | length 26.4
  Top Layer w0.3: U10.120@102.725,85.25 112.125,85.25 116.625,80.75 116.625,74.75 117.25,74.125 U12.33@121,74.125
SDRAM_DQ18: U10.126 U12.34 | length 35.1
  Top Layer w0.3: U10.126@98.125,87.35 98.125,89.486 98.764,90.125 108,90.125 117.125,81 117.125,75.125 117.625,74.625 U12.34@121,74.625
SDRAM_DQ19: U10.127 U12.36 | length 35.1
  Top Layer w0.3: U10.127@97.625,87.35 97.625,89.625 98.625,90.625 108.25,90.625 117.625,81.25 117.625,76.375 118.375,75.625 U12.36@121,75.625
SDRAM_DQ20: U10.128 U12.37 | length 36
  Top Layer w0.3: U10.128@97.125,87.35 97.125,89.875 98.5,91.25 108.5,91.25 118.125,81.625 118.125,78.249 118.111,78.235 118.111,77.014 118.125,77 119,76.125 U12.37@121,76.125
SDRAM_DQ21: U10.131 U12.39 | length 37.3
  Top Layer w0.3: U10.131@95.625,87.35 95.625,89.125 98.5,92 108.625,92 118.625,82 ; 118.625,82 118.625,78.11 118.563,78.048 118.563,77.437 118.875,77.125 U12.39@121,77.125
SDRAM_DQ22: U10.132 U12.40 | length 38.3
  Top Layer w0.3: U10.132@95.125,87.35 95.125,89.375 98.5,92.75 108.75,92.75 119.139,82.361 119.139,77.985 119.077,77.923 119.375,77.625 U12.40@121,77.625
SDRAM_DQ23: U10.134 U12.42 | length 38.9
  Top Layer w0.3: U10.134@94.125,87.35 94.125,89.5 98,93.375 108.875,93.375 119.625,82.625 119.625,78.875 119.875,78.625 U12.42@121,78.625
SDRAM_DQ24: U10.109 U12.45 | length 7.7
  Top Layer w0.3: U10.109@102.725,79.75 105.625,79.75 106.75,78.625 U12.45@110,78.625
SDRAM_DQ25: U10.108 U12.47 | length 7.9
  Top Layer w0.3: U10.108@102.725,79.25 105.25,79.25 106.875,77.625 U12.47@110,77.625
SDRAM_DQ26: U10.106 U12.48 | length 7.7
  Top Layer w0.3: U10.106@102.725,78.25 105.375,78.25 106.5,77.125 U12.48@110,77.125
SDRAM_DQ27: U10.103 U12.50 | length 7.5
  Top Layer w0.3: U10.103@102.725,76.75 105.5,76.75 106.125,76.125 U12.50@110,76.125
SDRAM_DQ28: U10.100 U12.51 | length 7.4
  Top Layer w0.3: U10.100@102.725,75.25 105.625,75.25 106,75.625 U12.51@110,75.625
SDRAM_DQ29: U10.99 U12.53 | length 7.3
  Top Layer w0.3: U10.99@102.725,74.75 107.125,74.75 107.25,74.625 U12.53@110,74.625
SDRAM_DQ30: U10.98 U12.54 | length 7.3
  Top Layer w0.3: U10.98@102.725,74.25 106.25,74.25 106.375,74.125 U12.54@110,74.125
SDRAM_DQ31: U10.95 U12.56 | length 7.4
  Top Layer w0.3: U10.95@102.725,72.75 107.125,72.75 107.5,73.125 U12.56@110,73.125
SDRAM_DQM0: U10.50 U12.16 | length 42
  Top Layer w0.3: U10.50@95.625,53.65 95.625,50.5 97.625,48.5 108.875,48.5 115,54.625 115,64.125 116.5,65.625 U12.16@121,65.625
SDRAM_DQM1: U10.73 U12.71 | length 8.9
  Top Layer w0.3: U10.73@102.725,61.75 105.375,61.75 108.898,65.273 108.898,65.312 109.211,65.625 U12.71@110,65.625
SDRAM_DQM2: U10.118 U12.28 | length 27.9
  Top Layer w0.3: U10.118@102.725,84.25 111.5,84.25 115.625,80.125 115.625,72.625 116.625,71.625 U12.28@121,71.625
SDRAM_DQM3: U10.94 U12.59 | length 7.5
  Top Layer w0.3: U10.94@102.725,72.25 105.25,72.25 105.875,71.625 U12.59@110,71.625
SDRAM_nCAS: U10.52 U12.18 | length 39.9
  Top Layer w0.3: U10.52@96.625,53.65 96.625,51.125 98.125,49.625 107.625,49.625 114,56 114,65.125 115.5,66.625 U12.18@121,66.625
SDRAM_nCS: U10.56 U12.20 | length 37.6
  Top Layer w0.3: U10.56@98.625,53.65 98.625,50.764 98.812,50.577 106.327,50.577 113,57.25 113,66.125 114.5,67.625 U12.20@121,67.625
SDRAM_nRAS: U10.55 U12.19 | length 38.3
  Top Layer w0.3: U10.55@98.125,53.65 98.125,50.625 98.625,50.125 106.875,50.125 113.5,56.75 113.5,65.625 115,67.125 U12.19@121,67.125
SDRAM_nWE: U10.51 U12.17 | length 40.8
  Top Layer w0.3: U10.51@96.125,53.65 96.125,50.875 97.875,49.125 108.375,49.125 114.5,55.25 114.5,64.5 116.125,66.125 U12.17@121,66.125
USBDM: J2.2 U5.16 | length 9.5
  Top Layer w0.3: U5.16@108.85,113.7 110.825,113.7 113.575,116.45 J2.2@113.575,120.075
USBDP: J2.3 U5.15 | length 8.4
  Top Layer w0.3: U5.15@108.85,114.35 110.6,114.35 112.925,116.675 J2.3@112.925,120.075
USER_FLASH_CLK: U4.6 U10.239 | length 18.8
  Top Layer w0.3: U4.6@59.35,46.26 57.74,46.26 57.375,46.625 57.375,48.375 65.25,56.25 U10.239@69.025,56.25
USER_FLASH_CS: U4.1 U10.6 | length 15.7
  Top Layer w0.3: U4.1@64.15,43.72 65.345,43.72 70.875,49.25 72.875,49.25 73.625,50 U10.6@73.625,53.65
USER_FLASH_DQ0: U4.5 U10.240 | length 14
  Top Layer w0.3: U4.5@59.35,47.53 59.35,49.1 66,55.75 U10.240@69.025,55.75
USER_FLASH_DQ1: U4.2 U10.5 | length 14.4
  Top Layer w0.3: U4.2@64.15,44.99 65.49,44.99 70.5,50 72.625,50 73.125,50.5 U10.5@73.125,53.65
USER_FLASH_DQ2: U4.3 U10.4 | length 13.2
  Top Layer w0.3: U4.3@64.15,46.26 65.635,46.26 70,50.625 72.375,50.625 72.625,50.875 U10.4@72.625,53.65
USER_FLASH_DQ3: U4.7 U10.238 | length 21.8
  Top Layer w0.3: U4.7@59.35,44.99 58.01,44.99 56.125,46.875 56.125,48.25 64.625,56.75 U10.238@69.025,56.75
VGA_B: 1.3 R52.2 R53.2 R54.2 | length 14.1
  Top Layer w0.3: 1.3@35.83,47.762 43.545,47.762 44.5,48.717 R53.2@44.5,48.75 R52.2@44.5,51.217 R54.2@44.5,53.75
VGA_G: 1.2 R43.2 R44.2 R48.2 | length 14
  Top Layer w0.3: 1.2@35.83,45.472 43.755,45.472 R48.2@44.5,46.217 R44.2@44.5,43.717 R43.2@44.5,41.217
VGA_HSYNC: 1.13 R37.1 | length 24.9
  Top Layer w0.3: 1.13@30.75,47.762 28.25,50.262 28.25,53.342 29.908,55 39.783,55 43.125,58.342 R37.1@44.5,58.342
VGA_R: 1.1 R38.2 R40.2 R42.2 | length 15.5
  Top Layer w0.3: 1.1@35.83,43.182 40.295,38.717 R42.2@44.5,38.717 R40.2@44.5,36.217 R38.2@44.5,33.717
VGA_VSYNC: 1.14 R34.1 | length 20.5
  Top Layer w0.3: 1.14@30.75,50.052 29.125,51.677 29.125,53.342 30.033,54.25 42.533,54.25 R34.1@44.5,56.217
Vjtag: J5.4 R39.1 R41.1 | length 11.8
  Bottom Layer w0.3: J5.4@81.625,30.335 82.677,31.387 82.677,33.311 81.875,34.113 R41.1@81.875,40.125 R39.1@83.125,40.125
WIFI_CH_PD: P3.6 R25.1 | length 4.9
  Bottom Layer w0.3: R25.1@44.625,115.75 44.625,112.29 P3.6@45.665,111.25
WIFI_GPIO0: P3.3 R28.1 R30.2 | length 4.3
  Bottom Layer w0.3: P3.3@43.125,108.71 43.125,106.25 R28.1@43.375,106 R30.2@44.875,106
WIFI_GPIO2: P3.5 R27.1 | length 10.1
  Bottom Layer w0.3: R27.1@45.625,117.75 45.625,113.625 46.875,112.375 46.875,109.92 P3.5@45.665,108.71
WIFI_RESET: P3.4 R26.1 U10.200 | length 55.3
  Top Layer w0.3: P3.4@43.125,111.25 41.875,110 41.875,103.375 57.5,87.75 57.5,78.5 60.25,75.75 U10.200@69.025,75.75
  Bottom Layer w0.3: P3.4@43.125,111.25 R26.1@43.125,114.125
WIFI_RXD: P3.1 U10.201 | length 50.7
  Top Layer w0.3: P3.1@40.585,108.71 40.585,103.79 56.875,87.5 56.875,78.125 59.75,75.25 U10.201@69.025,75.25
WIFI_TXD: P3.8 U10.197 | length 48
  Top Layer w0.3: P3.8@48.205,111.25 49.625,109.83 49.625,96.75 58.125,88.25 58.125,79 59.875,77.25 U10.197@69.025,77.25
pads on no net: 1.4 1.9 1.11 1.12 1.15 1.G1 1.G2 D5.1 D6.1 D7.1 D8.1 J1.2 J1.6 J2.4 J3.2 J3.6 J4.9 J4.10 J4.11 J4.12 J4.13 J4.14 J5.6 J5.7 J5.8 P4.1 P4.3 U5.2 U5.3 U5.6 U5.8 U5.9 U5.10 U5.11 U5.12 U5.13 U5.22 U5.23 U5.24 U5.27 U5.28 U10.9 U10.13 U10.18 U10.21 U10.22 U10.169 U10.181 U10.182 U10.183 U10.184 U10.185 U10.186 U10.187 U10.188 U10.189 U10.194 U10.195 U10.196

## Polygon pours and split planes (outlines as drawn)
GND on Top Layer "Top Layer-GND" (solid, pour order 0): 25,25 25,125 125,125 125,25
GND on Bottom Layer "GND_L02_P002" (solid, pour order 2): 25,25 25,125 125,125 125,25

## Other copper
Bottom Layer:
  rectangle net 3V: 114.25,55.125 115.875,82.125
  rectangle net 3V: 107.125,49.25 108.75,77.25
  rectangle net 2.5V: 78.375,63.125 95.25,78.375
  rectangle net 3V: 75.625,92.125 99.625,93.125
  rectangle net 3V: 62.5,48.375 63.75,81.25
  rectangle net 1.2V: 73.75,61.25 74.375,81.875
  rectangle net 1.2V: 79.875,57.5 98.125,58.125
  rectangle net 1.2V: 91.25,81.875 98.125,82.5
  rectangle net 1.2V: 97.5,57.5 98.125,82.5
  rectangle net 3V: 95.875,103.875 102.375,106.5
  rectangle net 2.5V: 86.375,106 92.625,108.5
  rectangle net 1.2V: 84.75,96.25 91.125,98.875
  rectangle net 3V: 87.875,47.625 108.75,49.25
  rectangle net 3V: 62.5,48.375 80.75,49.125

## Silkscreen, mask and mechanical layers (free items; w line width, h text height)
Top Overlay:
  lines w0.254: 51.585,87.625 37.27,87.625 37.27,112.52 44.375,112.52 51.605,112.52 51.605,87.645
  text "ArmleoPC Rev 2.0 / Arman Avetisyan / (C) 04.2019" at 56.125,111.75 h1.52
  text "Mouse" at 37.5,84.625 h1.52
  text "Keyboard" at 56.125,68.375 h1.52 r90
Mechanical 1:
  the board outline again, w0

## Text inside footprints (layer, text, board x,y; h text height)
C1: Top Overlay "+" at 95.837,111.331 h1.52
C2: Top Overlay "+" at 93.078,118.794 h1.52 r180
C3: Top Overlay "+" at 59.294,92.672 h1.52 r90
C4: Top Overlay "+" at 53.706,107.663 h1.52 r270
P3: Top Overlay "8" at 49.729,110.742 h1.27; Top Overlay "7" at 49.729,108.202 h1.27; Top Overlay "1" at 38.553,108.202 h1.27; Top Overlay "2" at 38.045,110.742 h1.27
P4: Top Overlay "2" at 28.133,102.045 h1.27 r90; Top Overlay "1" at 30.673,102.553 h1.27 r90; Top Overlay "9" at 30.673,116.269 h1.27 r90; Top Overlay "10" at 28.133,116.269 h1.27 r90